# EAGLE board Nusbio.TestExtension.01 (EAGLE 7.6.0)
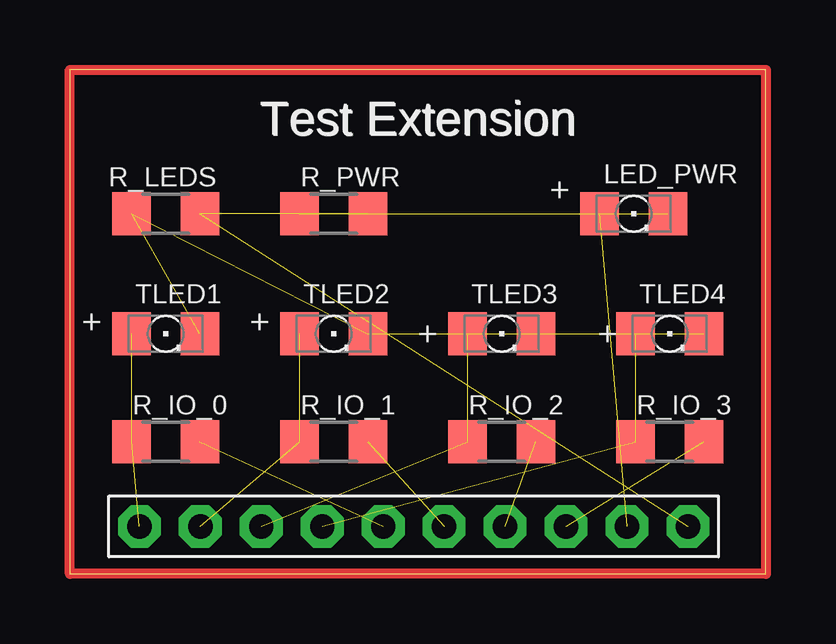
[diagram p0: board, top side]

Size 29 x 21 mm. Coordinates in mm from the lower left corner, seen from the top.
Outline: 0,0 29,0 29,21 0,21 0,0
Copper layers (1*16): Top 0.035mm / dielectric 1.5mm / Bottom 0.035mm
Design rules "default": minimum track width 10mil, minimum drill 24mil, track to track 8mil, track to pad 8mil, pad to pad 8mil, via to via 8mil, smd to smd 8mil, copper to edge 40mil, drill to drill 8mil, minimum pad ring 10mil, minimum via ring 8mil, stop-mask expansion 4mil, vias tented up to drill 0mil, thermal gap 10mil

## Footprints (pad centres in the part's own frame; a part is rotated, then mirrored left to right if it is on the bottom)
1206 = smd 1.6 x 1.803: A -1.422,0; C 1.422,0
R1206 = smd 1.6 x 1.803: 1 -1.422,0; 2 1.422,0
1X10-BIG = drill 1.016 pad 1.778 octagon: 1 -11.43,0; 2 -8.89,0; 3 -6.35,0; 4 -3.81,0; 5 -1.27,0; 6 1.27,0; 7 3.81,0; 8 6.35,0; 9 8.89,0; 10 11.43,0

## Placement (x,y rotation side)
LED_PWR  [1206]  23.5,15 0 top
R_IO_0  [R1206]  4,5.5 0 top
R_IO_1  [R1206]  11,5.5 0 top
R_IO_2  [R1206]  18,5.5 0 top
R_IO_3  [R1206]  25,5.5 0 top
R_LEDS  [R1206]  4,15 0 top
R_PWR  [R1206]  11,15 0 top
TLED1  [1206]  4,10 0 top
TLED2  [1206]  11,10 0 top
TLED3  [1206]  18,10 0 top
TLED4  [1206]  25,10 0 top
U$1  PINHD-1X10  [1X10-BIG]  14.33,1.97 0 top

## Library data of the parts
LED_PWR R_IO_0 R_IO_1-R_IO_3 R_LEDS R_PWR TLED1-TLED4 U$1 = adafruit

## Nets
N$1: R_IO_3.2 U$1.8
N$2: R_LEDS.1 TLED1.C TLED2.C TLED3.C TLED4.C
N$3: R_LEDS.2 R_PWR.2 U$1.10
N$4: LED_PWR.A U$1.9
N$5: LED_PWR.C R_PWR.1
N$6: R_IO_3.1 TLED4.A U$1.4
N$7: R_IO_0.1 TLED1.A U$1.1
N$8: R_IO_2.2 U$1.7
N$9: R_IO_1.2 U$1.6
N$10: R_IO_0.2 U$1.5
N$11: R_IO_2.1 TLED3.A U$1.3
N$12: R_IO_1.1 TLED2.A U$1.2

## Tracks (layer width: path | path; a pad name or v marks a point on that pad's centre or on a via)
N$1  (1 unrouted)
N$2  (4 unrouted)
N$3  (2 unrouted)
N$4  (1 unrouted)
N$5  (1 unrouted)
N$6  (2 unrouted)
N$7  (2 unrouted)
N$8  (1 unrouted)
N$9  (1 unrouted)
N$10  (1 unrouted)
N$11  (2 unrouted)
N$12  (2 unrouted)
N$13
  Top 0.406: 0,21 29,21 29,0 0,0 0,21

## Text on the board
tNames: Test Extension | Test Extension | + | + | + | + | +
bNames: MadeInTheUSB.net | PCBv2 2017.09 /ft